# Altium PCB TP3PCB2.PcbDoc
Units mm, origin at the board's own origin, x right, y up, seen from the top; angles counter-clockwise.
Board outline 41 x 58.5 mm, 2 copper layers (Top Layer, Bottom Layer); 36 components, 22 nets, 142 pads, 20 vias.
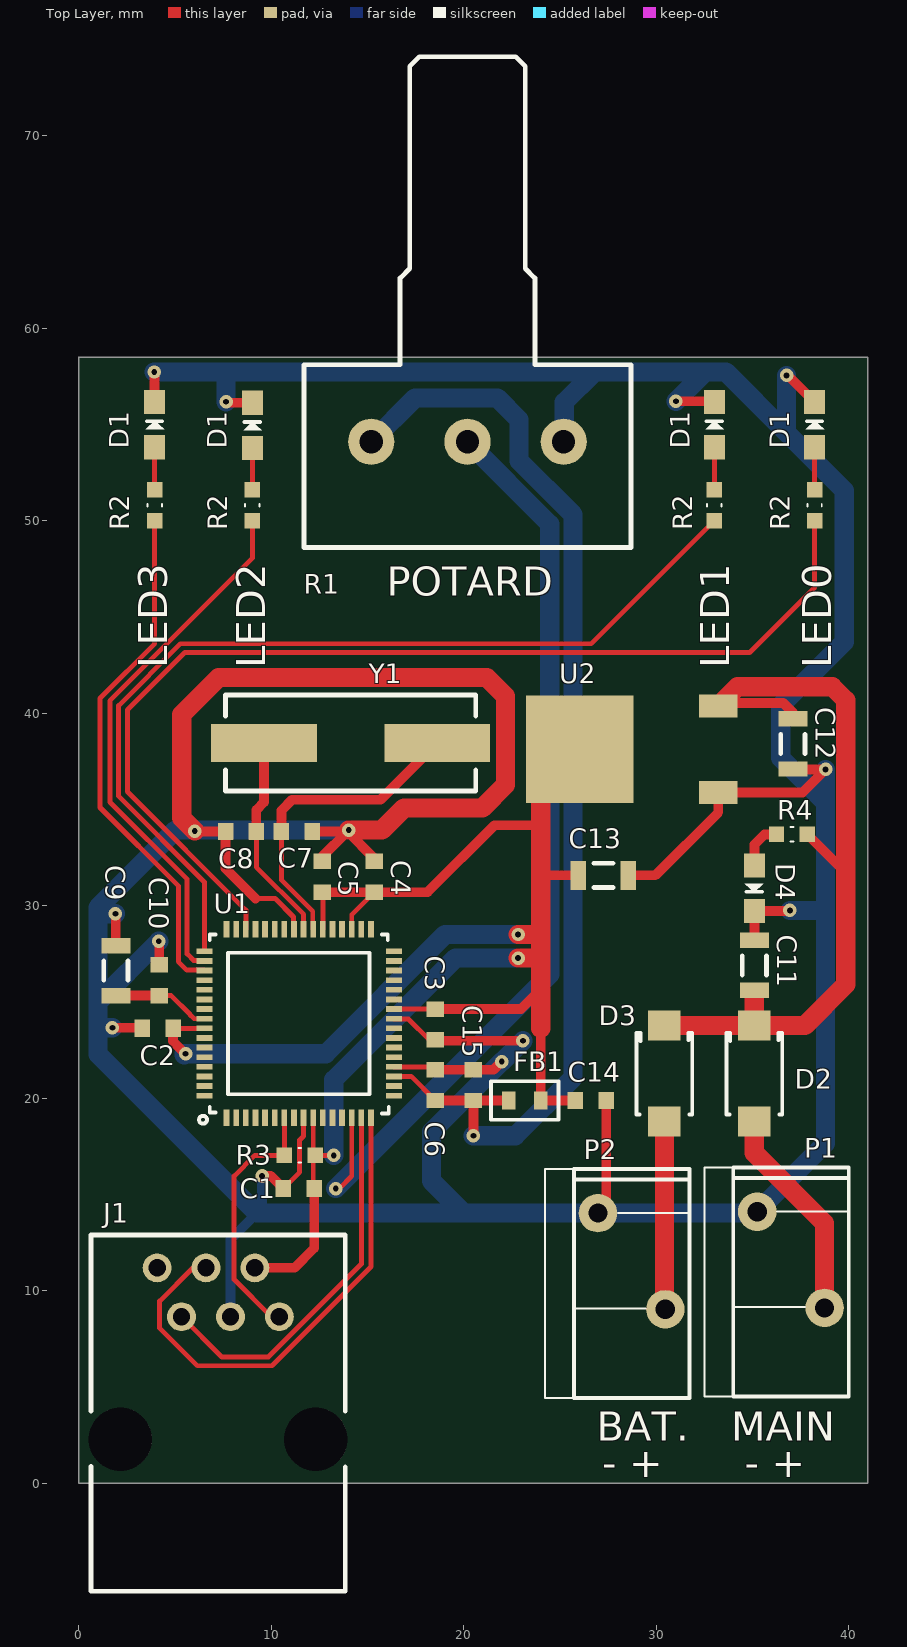
[diagram p0: Top Layer view]
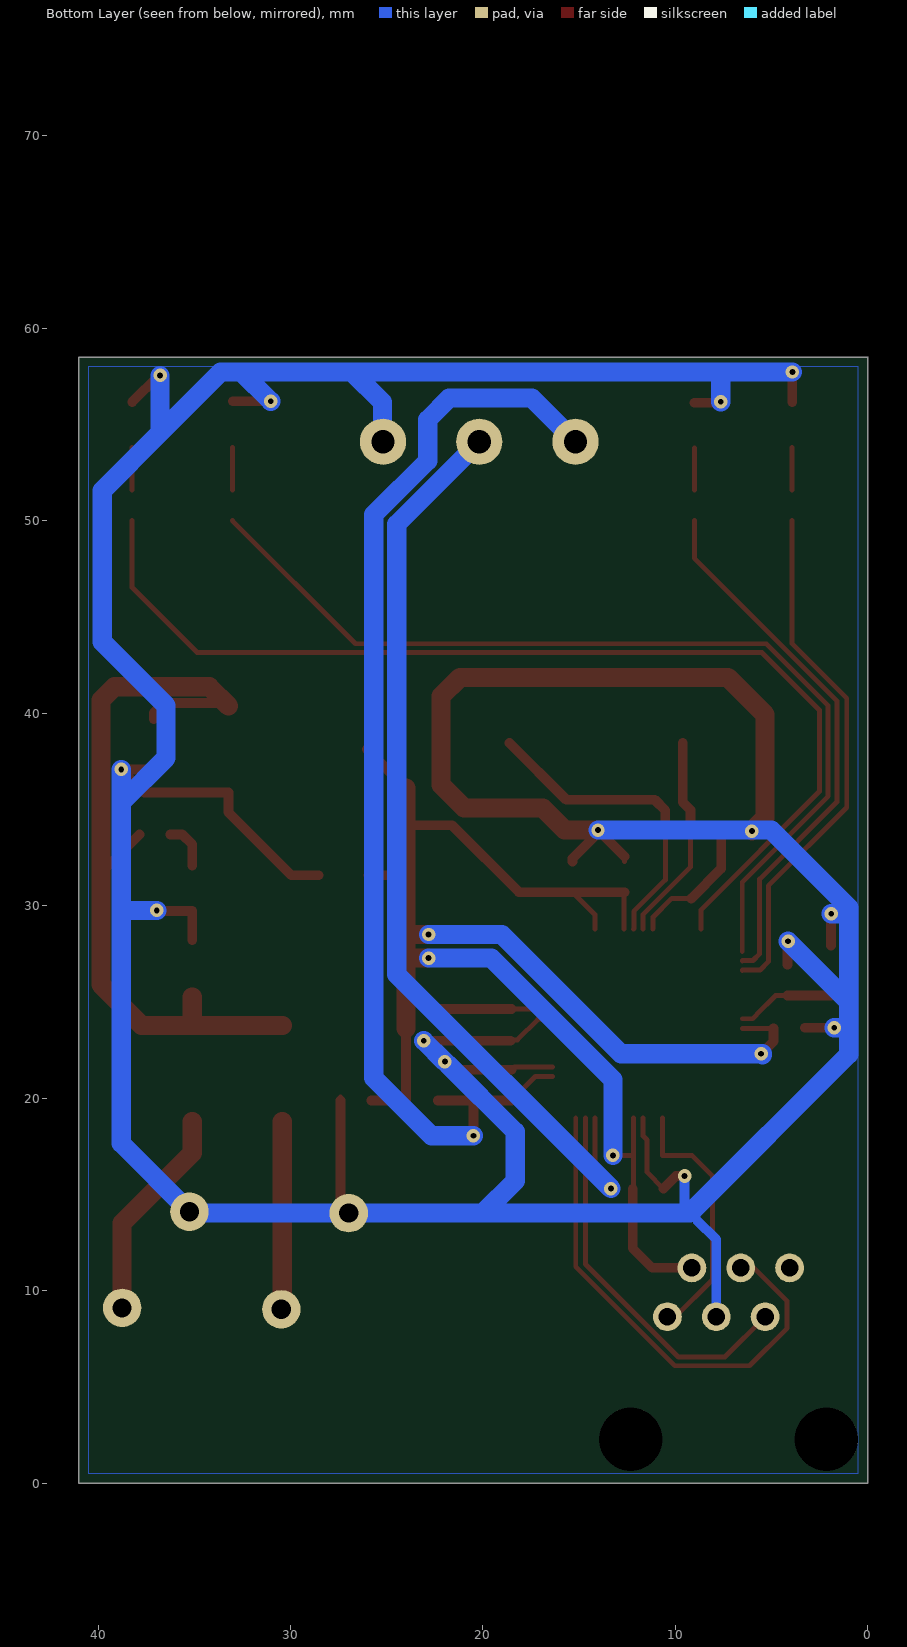
[diagram p1: Bottom Layer view, seen from below]

## Layer stack, top to bottom
Top Solder: solder mask 0.0102, Solder Resist, Dk 3.5
Top Layer: signal copper 0.0356
Dielectric 1: dielectric 0.32, FR-4, Dk 4.8
Bottom Layer: signal copper 0.0356
Bottom Solder: solder mask 0.0102, Solder Resist, Dk 3.5

## Board outline
0,0 0,58.5 41,58.5 41,0

## Design rules (kind name [scope] priority, off if disabled: settings)
Clearance [All] p1: gap=0.2 except(0.254: Arc-Arc)
HoleSize [All] p1: absolutevalues=TRUE maxlimit=3.3 minlimit=0.025 maxpercent=80.000 minpercent=20.000
PolygonConnect [All] p1: connectstyle=Relief reliefconductorwidth=0.254 reliefentries=4 polygonreliefangle="90 Angle" airgapwidth=0.254
RoutingVias [All] p1: holewidth=0.711 width=1.27 viastyle="Through Hole" minholewidth=0.3 minwidth=0.7 maxholewidth=0.711 maxwidth=1.27
SilkToBoardRegionClearance [All] p1 off:
SolderMaskExpansion [All] p1: expansion=0.102
UnpouredPolygon [All] p1: allowunpoured=FALSE
Width [All] p1: maxlimit=1 minlimit=0.254 preferedwidth=0.254 minimp=50.000000 maximp=50.000000 favimp=50.000000
Width GND [InNet('GND')] p2 off: maxlimit=1 minlimit=0.508 preferedwidth=1 minimp=50.000000 maximp=50.000000 favimp=50.000000
Width ALIM [InNet('ALIM')] p3 off: maxlimit=1 minlimit=0.254 preferedwidth=1
Width BATTERY [InNet('BATTERY')] p4 off: maxlimit=1 minlimit=0.254 preferedwidth=1
27 further rules are at their usual default settings.

## Classes and differential pairs
component class LED0: LED3_LED0 R2_3_LED1
component class LED3: R2
component class PIC: C1 C2 C3 C4 C6 C7 C8 C9 C10 J1 R3 U1 Y1
component class POWER: C11 C12 C13 C14 C15 D2 D3 D4 FB1 P1 P2 R4 U2
component class TP3: R1
net class LED[0..3]: LED0 LED1 LED2 LED3
channel class led: LED0 LED1 LED2 LED3

## Components (designator, comment, footprint, x,y, rotation, side; value= is the part's Value field where it differs from the comment)
C1 "100nF" CAPC1608N#1 11.425,15.3 r0 top
C2 "100nF" CAPC1608N#1 4.1,23.625 r0 top
C3 "100nF" CAPC1608N#1 18.525,23.825 r90 top
C4 "100nF" CAPC1608N#1 15.35,31.5 r270 top
C5 "100nF" CAPC1608N#1 12.65,31.5 r270 top
C6 "100nF" CAPC1608N#1 18.525,20.675 r270 top
C7 "20pF" CAPC1608N#1 11.325,33.85 r0 top
C8 "20pF" CAPC1608N#2 8.425,33.85 r0 top
C9 "10uF" CAPC2012N 1.925,26.625 r270 top
C10 "1uF" CAPC1608N#1 4.175,26.125 r270 top
C11 "10uF" CAPC2012N 35.1,26.9 r270 top
C12 "10uF" CAPC2012N 37.1,38.4 r90 top
C13 "10uF" CAPC2012N 27.25,31.575 r180 top
C14 "1uF" CAPC1608N#1 26.6,19.875 r180 top
C15 "100nF" CAPC1608N#1 20.5,20.675 r270 top
D1 "Green LED" "LED 0805" 38.227,54.991 r90 top
D1 "Green LED" "LED 0805" 33.02,54.991 r90 top
D1 "Green LED" "LED 0805" 9.017,54.953 r90 top
D1 "Green LED" "LED 0805" 3.937,54.991 r90 top
D2 "GF1A" SMA/DO-214AC 35.1,21.275 r90 top
D3 "GF1A" SMA/DO-214AC 30.425,21.275 r90 top
D4 "Green LED" "LED 0805" 35.1,30.9 r270 top
FB1 "600r" INDC1608AN 23.175,19.875 r0 top
J1 "Program / Debug" RJ12_90 7.239,6.731 r270 top
P1 "12V Main" PHOENIX_1985195 37,11.6 r0 top
P2 "12V Battery" PHOENIX_1985195 28.725,11.525 r0 top
R1 "1kΩ" PDB181-K 20.193,54.102 r0 top
R2 "330Ω" RESC1608N 38.227,50.8 r270 top
R2 "330Ω" RESC1608N 33.02,50.8 r270 top
R2 "330Ω" RESC1608N 9.017,50.8 r270 top
R2 "330Ω" RESC1608N 3.937,50.8 r270 top
R3 "4.7kΩ" RESC1608N 11.475,17.025 r0 top
R4 "470Ω" RESC1608N 37.05,33.7 r0 top
U1 "PIC32MX764F128H-I/PT" QFP50P1200X1200X120-64 11.43,23.876 r90 top
U2 "AP1117" TD03B_N 29.625,38.125 r90 top
Y1 "8MHz" HC49SDLF 14.125,38.45 r0 top

## Footprints (in the part's own frame and the unit in brackets; to place one, negate y for a bottom-side part, rotate by r counter-clockwise, add the part's x,y. Pads: shape width x height; smd on the part's side, far side on the other; paste and mask are expansions set on the pad)
CAPC1608N#1 [mm]
  rect 0.8x0.9 smd: 1(-0.8,0) 2(0.8,0)
CAPC1608N#2 [mm]
  rect 0.8x0.9 smd: 1(0.8,0) 2(-0.8,0)
CAPC2012N [mm]
  rect 0.8x1.5 smd: 1(-1.3,0) 2(1.3,0)
  silkscreen extent -0.5,-0.63 0.5,0.63
HC49SDLF [mm]
  rect 5.5x2 smd: 1(-4.5,0) 2(4.5,0)
  silkscreen extent -6.5,-2.5 6.5,2.5
INDC1608AN [mm]
  rect 0.7x0.95 smd: 1(0.825,0) 2(-0.825,0)
  silkscreen extent -1.75,-1 1.75,1
"LED 0805" [mm]
  rect 1.25x1.1 smd: 1(-1.175,0) 2(1.175,0)
  silkscreen extent -0.25,-0.5 0.2,0.45
PDB181-K [mm]
  round 2.4 hole 1.2: 1(-5,0) 2(0,0) 3(5,0)
  silkscreen extent -8.5,-5.5 8.5,20
PHOENIX_1985195 [mm]
  round 2 hole 1: 1(-1.75,2.5) 2(1.75,-2.5)
  silkscreen extent -4.5,-7.1 3,4.8
QFP50P1200X1200X120-64 [mm]
  rect 0.85x0.3 smd: 1(-4.9,3.75) 2(-4.9,3.25) 3(-4.9,2.75) 4(-4.9,2.25) 5(-4.9,1.75) 6(-4.9,1.25) 7(-4.9,0.75) 8(-4.9,0.25) 9(-4.9,-0.25) 10(-4.9,-0.75) 11(-4.9,-1.25) 12(-4.9,-1.75) 13(-4.9,-2.25) 14(-4.9,-2.75) 15(-4.9,-3.25) 16(-4.9,-3.75) 33(4.9,-3.75) 34(4.9,-3.25) 35(4.9,-2.75) 36(4.9,-2.25) 37(4.9,-1.75) 38(4.9,-1.25) 39(4.9,-0.75) 40(4.9,-0.25) 41(4.9,0.25) 42(4.9,0.75) 43(4.9,1.25) 44(4.9,1.75) 45(4.9,2.25) 46(4.9,2.75) 47(4.9,3.25) 48(4.9,3.75)
  rect 0.3x0.85 smd: 17(-3.75,-4.95) 18(-3.25,-4.95) 19(-2.75,-4.95) 20(-2.25,-4.95) 21(-1.75,-4.95) 22(-1.25,-4.95) 23(-0.75,-4.95) 24(-0.25,-4.95) 25(0.25,-4.95) 26(0.75,-4.95) 27(1.25,-4.95) 28(1.75,-4.95) 29(2.25,-4.95) 30(2.75,-4.95) 31(3.25,-4.95) 32(3.75,-4.95) 49(3.75,4.9) 50(3.25,4.9) 51(2.75,4.9) 52(2.25,4.9) 53(1.75,4.9) 54(1.25,4.9) 55(0.75,4.9) 56(0.25,4.9) 57(-0.25,4.9) 58(-0.75,4.9) 59(-1.25,4.9) 60(-1.75,4.9) 61(-2.25,4.9) 62(-2.75,4.9) 63(-3.25,4.9) 64(-3.75,4.9)
  silkscreen extent -5.21,-4.67 4.62,5.18
RESC1608N [mm]
  rect 0.8x0.8 smd: 1(-0.8,0) 2(0.8,0)
  silkscreen extent -0.08,-0.38 0.08,0.38
RJ12_90 [mm]
  round 3.25 hole 3.3 unplated: 0(4.45,5.08) 0(4.45,-5.08)
  round 1.5 hole 0.9: 1(-1.91,3.18) 2(-4.45,1.91) 3(-1.91,0.64) 4(-4.45,-0.63) 5(-1.91,-1.9) 6(-4.45,-3.17)
  silkscreen extent -6.15,-6.6 12.35,6.6
SMA/DO-214AC [mm]
  rect 1.56x1.68 smd: 1(-2.5,0) 2(2.5,0)
  silkscreen extent -2.12,-1.45 2.1,1.45
TD03B_N [mm]
  rect 1.2x2 smd: 1(-2.25,-3.6) 3(2.25,-3.6)
  rect 5.6x5.6 smd: 4(0,3.6)

## Part data
C1 C2 C3 C4 C5 C6 C7 C8 C9 C10 C11 C12 C13 C14 C15: library part Cap, "Capacitor"
D1 D1 D1 D1 D4: library part LED0, "Typical INFRARED GaAs LED"
D2 D3: library part Diode, "Default Diode"
FB1: library part Inductor, "Inductor"
J1: library part CON6
P1 P2: library part "Header 2", "Header, 2-Pin"
R1: library part RPot, "Potentiometer"
R2 R2 R2 R2 R3 R4: library part Res1, "Resistor"
U1: "PIC32MX764F128H"
U2: "1A LDO, 18V input, DPAK"
Y1: library part XTAL, "Crystal Oscillator"

## Via types
v1: diameter 0.7, hole 0.3, Top Layer to Bottom Layer, 19 vias
v2: diameter 0.71, hole 0.3, Top Layer to Bottom Layer, 1 vias

## Nets (pads, with @x,y where several pads share a name; then routed paths per layer and width w, separated by ;. In a path a pad name is that pad's centre, name@x,y a point inside that pad or via, vN(x,y) a via of type N, cw(c..) or ccw(c..) an arc to the next point about the centre after c; other vN are vias at no path point)
ALIM: D2.1 P1.2 | length 11.2
  Top Layer w1: D2.1 35.1,17.15 38.75,13.5 P1.2
BATTERY: D3.1 P2.2 | length 9.8
  Top Layer w1: D3.1 30.425,9.075 P2.2
GND: C1.1 C2.1 C3.1 C4.1 C5.1 C6.1 C7.2 C8.2 C9.1 C10.1 C11.1 C12.1 C13.1 C14.1 C15.1 D1.2 D4.2 J1.3 P1.1 P2.1 R1.3 U1.9 U1.20 U1.25 U1.41 U2.1 | length 286.2
  Top Layer w0.254: v1(1.9,29.575) v1@1.925,29.55 ; v1(7.65,56.175) v1@7.697,56.128 ; 9.175,30.375 10.194,30.375 11.157,29.412 11.157,28.799 U1.41 ; C1.1 11.475,16.15 11.475,17.825 11.68,18.03 U1.9 ; C5.1 C5.1@12.65,32.55 ; U1.20 18.374,21.626 C6.1 ; U1.25 16.403,24.103 17.132,24.103 18.21,23.025 C3.1 C3.1@18.575,22.975 ; C14.1 C14.1@27.4,20.05 ; D1.2@32.986,56.2 D1.2@33.02,56.166 ; v1(36.775,57.55) v1@36.843,57.55
  Top Layer w0.5: P2.1 P2.1@27.4,14.45
  Top Layer w0.508: v1(1.75,23.65) C2.1@3.275,23.65 ; C9.1 v1@1.925,29.55 ; D1.2@3.937,56.166 v1@3.937,57.713 ; C10.1 v1@4.175,28.125 ; v1(6.025,33.875) 6.05,33.85 C8.2 7.625,31.925 9.175,30.375 ; v1@7.697,56.128 D1.2@9.017,56.128 ; v2(9.525,15.95) 9.975,15.95 C1.1 ; C7.2 v1@13.95,33.85 ; C5.1@12.65,32.55 v1@13.95,33.85 ; C4.1 15.35,32.45 v1@13.95,33.85 ; C6.1 C15.1 21.55,21.475 v1(21.975,21.9) ; C3.1@18.575,22.975 v1(23.075,22.975) ; P2.1@27.4,14.45 C14.1 ; C13.1 29.95,31.575 33.225,34.85 U2.1 37.6,35.875 v1(38.8,37.075) C12.1@37.125,37.075 ; v1(31.025,56.2) D1.2@32.986,56.2 ; C11.1 D4.2 v1@36.925,29.725 ; v1@36.843,57.55 D1.2@38.227,56.166
  Top Layer w1: v1(6.025,33.875) 5.35,34.55 5.35,39.925 7.275,41.85 21.2,41.85 22.175,40.875 22.175,36.275 20.975,35.075 16.9,35.075 15.75,33.925 v1(14.025,33.925)
  Bottom Layer w0.254: 1,23.625 1.025,23.65 ; 7.65,57.7 7.675,57.725 ; 9.25,14.025 9.525,14.3 ; 32.55,57.725 32.6,57.725
  Bottom Layer w0.5: J1.3 7.879,12.654 8.9,13.675
  Bottom Layer w0.508: 9.525,14.3 v2(9.525,15.95)
  Bottom Layer w1: 1,25 v1(4.15,28.15) ; 1.025,23.65 v1(1.75,23.65) ; v1(1.9,29.575) 1,29.575 ; v1(3.925,57.725) 7.675,57.725 32.55,57.725 v1(31.025,56.2) ; v1(7.65,56.175) 7.65,57.7 ; v1(14.025,33.925) 5.025,33.925 1,29.9 1,29.575 ; v1@21.85,21.775 18.325,18.25 18.325,15.7 20,14.025 ; v1(21.975,21.9) 22,21.9 v1(23.075,22.975) ; R1.3 25.225,54.134 25.225,56.15 26.8,57.725 ; 32.6,57.725 33.625,57.725 36.775,54.575 ; P1.1@35.175,14.025 P2.1 20,14.025 ; P1.1 38.8,17.65 38.8,35.35 ; v1(36.775,57.55) 36.775,54.575 ; v1(36.95,29.75) 38.775,29.75 ; v1(38.8,37.075) 38.8,35.35 ; 1,29.575 1,23.625 1,22.275 9.25,14.025 20,14.025 ; 36.775,54.575 39.775,51.575 39.775,43.7 36.475,40.4 36.475,37.675 38.8,35.35
LED0: R2.2@38.227,50 U1.46 | length 55.8
  Top Layer w0.254: U1.46 8.68,29.77 2.521,35.929 2.521,40.163 5.508,43.15 34.85,43.15 38.227,46.527 R2.2@38.227,50
LED1: R2.2@33.02,50 U1.49 | length 49.5
  Top Layer w0.254: U1.49 6.53,31.22 2.067,35.683 2.067,40.392 5.279,43.604 26.624,43.604 R2.2@33.02,50
LED2: R2.2@9.017,50 U1.50 | length 28.3
  Top Layer w0.254: U1.50 6.53,27.149 5.97,27.149 5.625,27.494 5.625,31.375 1.613,35.387 1.613,40.646 9.017,48.05 R2.2@9.017,50
LED3: R2.2@3.937,50 U1.51 | length 27.3
  Top Layer w0.254: R2.2@3.937,50 3.937,43.612 1.1,40.775 1.1,35.1 5.171,31.029 5.171,27.088 5.61,26.649 6.507,26.649 U1.51
MCLR: J1.1 R3.1 U1.7 | length 13.5
  Top Layer w0.254: J1.1 10.009,8.641 8.072,10.578 8.072,15.947 9.15,17.025 R3.1 ; R3.1@10.68,17.03 U1.7
NetC9_2: C9.2 C10.2 U1.56 | length 5.1
  Top Layer w0.254: C10.2 4.8,25.325 5.778,24.347 5.778,24.341 5.993,24.126 U1.56
  Top Layer w0.508: C9.2 C10.2
NetD1_LED0_1: D1.1@38.227,53.816 R2.1@38.227,51.6 | length 2.2
  Top Layer w0.254: R2.1@38.227,51.6 D1.1@38.227,53.816
NetD1_LED1_1: D1.1@33.02,53.816 R2.1@33.02,51.6 | length 2.2
  Top Layer w0.254: R2.1@33.02,51.6 D1.1@33.02,53.816
NetD1_LED2_1: D1.1@9.017,53.778 R2.1@9.017,51.6 | length 2.2
  Top Layer w0.254: R2.1@9.017,51.6 D1.1@9.017,53.778
NetD1_LED3_1: D1.1@3.937,53.816 R2.1@3.937,51.6 | length 2.2
  Top Layer w0.254: R2.1@3.937,51.6 D1.1@3.937,53.816
NetD4_1: D4.1 R4.1 | length 2.5
  Top Layer w0.508: D4.1 35.1,33.175 35.625,33.7 R4.1
NetR1_2: R1.2 U1.14 | length 49.3
  Top Layer w0.254: v1(13.35,15.3) 13.525,15.3 14.18,15.955 U1.14
  Bottom Layer w1: v1(13.35,15.3) 24.475,26.425 24.475,49.82 R1.2
PGC: J1.5 U1.15 | length 19.8
  Top Layer w0.254: J1.5 7.43,6.55 9.851,6.55 14.68,11.379 U1.15
PGD: J1.4 U1.16 | length 26.2
  Top Layer w0.254: J1.4 5.931,11.181 4.2,9.45 4.2,8.05 6.154,6.096 10.039,6.096 15.18,11.237 U1.16
V3P3: C1.2 C2.2 C3.2 C4.2 C5.2 C13.2 C14.2 FB1.1 J1.2 R3.2 U1.10 U1.26 U1.35 U1.38 U1.57 U2.4 | length 101
  Top Layer w0.254: C2.2@4.901,23.626 U1.57 ; U1.10 12.18,15.345 C1.2 ; R3.2 v1(13.25,17.025) ; U1.38 C5.2@12.68,30.67 ; U1.35 14.18,29.53 C4.2 ; U1.26 C3.2
  Top Layer w0.5: J1.2 11.206,11.181 12.225,12.2 C1.2 ; 23.9,28.5 24,28.4 ; 23.95,29.975 24,29.925 ; 23.95,31.4 24,31.45 ; 23.95,33 24,33.05 ; 23.975,27.275 24,27.3
  Top Layer w0.508: C2.2 4.9,22.951 v1(5.55,22.301) ; C5.2 C4.2 18.125,30.7 21.6,34.175 23.925,34.175 ; C3.2 C3.2 ; C3.2@18.526,24.626 C3.2 ; 24,23.625 FB1.1 C14.2 ; 24,25.65 22.975,24.625 C3.2 ; U2.4@24,36.1 U2.4 ; 24.175,31.575 C13.2
  Top Layer w1: v1(22.825,27.275) 23.975,27.275 ; v1(22.825,28.5) 23.9,28.5 ; 24,23.625 24,25.65 24,27.3 24,28.4 24,29.925 24,31.45 24,33.05 U2.4@24,36.1
  Bottom Layer w1: v1@5.475,22.25 v1@5.525,22.3 ; v1@5.475,22.3 v1@5.525,22.3 ; v1(5.55,22.301) 5.526,22.301 v1@5.525,22.3 ; v1(13.25,17.025) 13.25,20.95 19.575,27.275 v1(22.825,27.275) ; v1(22.825,28.5) 19.025,28.5 12.825,22.3 v1@5.525,22.3
V3P3A: C6.2 C15.2 FB1.2 R1.1 U1.19 | length 59.2
  Top Layer w0.254: U1.19 17.274,21.126 C6.2
  Top Layer w0.508: C6.2 C15.2 ; v1(20.5,18.05) C15.2 ; FB1.2 C15.2
  Bottom Layer w1: R1.1 17.466,56.375 21.75,56.375 22.875,55.25 22.875,53.117 25.675,50.317 25.675,21.05 22.675,18.05 v1(20.5,18.05)
V5: C11.2 C12.2 D2.2 D3.2 R4.2 U2.3 | length 41.1
  Top Layer w0.508: U2.3 33.375,40.525 36.6,40.525 37.1,40.025 C12.2 ; R4.2 39.725,31.825 39.85,31.825
  Top Layer w1: D3.2 D2.2 ; U2.3 34.225,41.375 39.15,41.375 39.85,40.675 39.85,31.825 39.85,25.9 37.725,23.775 D2.2 ; C11.2@35.1,25.25 D2.2
X1: C7.1 U1.39 Y1.2 | length 16.4
  Top Layer w0.254: C7.1 10.525,31.342 12.157,29.71 12.157,28.799 U1.39
  Top Layer w0.508: C7.1 10.525,34.95 11.075,35.5 15.675,35.5 Y1.2
X2: C8.1 U1.40 Y1.1 | length 10.9
  Top Layer w0.254: C8.1 9.225,32 11.68,29.545 U1.40
  Top Layer w0.508: C8.1 9.225,34.975 9.625,35.375 Y1.1
pads on no net: J1.0 J1.6 U1.1 U1.2 U1.3 U1.4 U1.5 U1.6 U1.8 U1.11 U1.12 U1.13 U1.17 U1.18 U1.21 U1.22 U1.23 U1.24 U1.27 U1.28 U1.29 U1.30 U1.31 U1.32 U1.33 U1.34 U1.36 U1.37 U1.42 U1.43 U1.44 U1.45 U1.47 U1.48 U1.52 U1.53 U1.54 U1.55 U1.58 U1.59 U1.60 U1.61 U1.62 U1.63 U1.64

## Polygon pours and split planes (outlines as drawn)
GND on Bottom Layer "Top Layer-No Net" (solid, shelved, pour order 5): 0.5,58 40.5,58 40.5,0.5 0.5,0.5 0.5,0.55 0.5,1.575

## Keep-outs
Drill Drawing:
  lines w0.1: 0,58.5 0,58.5
Mechanical 32:
  the board outline again, w0.15

## Silkscreen, mask and mechanical layers (free items; w line width, h text height)
Top Overlay:
  text "POTARD" at 16,46.1 h1.52
  text "LED3" at 4.6,42.325 h1.52 r90
  text "LED2" at 9.7,42.325 h1.52 r90
  text "LED1" at 33.8,42.325 h1.52 r90
  text "LED0" at 39.1,42.325 h1.52 r90
  text "BAT." at 26.9,2.2 h1.52
  text "MAIN" at 33.9,2.2 h1.52
  text "- +" at 27.2,0.3 h1.52
  text "- +" at 34.6,0.3 h1.52
Drill Drawing:
  circle w0.025: c49.165,13.108 r0.635
  lines w0.025: 48.53,4.853 49.165,5.171 49.8,4.853 49.483,5.488 49.8,6.123 49.165,5.806 48.53,6.123 48.848,5.488 48.53,4.853 ; 48.53,8.663 49.8,8.663 49.8,9.933 48.53,9.933 48.53,8.663 ; 48.53,17.553 49.8,17.553 49.165,16.283 48.53,17.553 ; 48.53,20.411 48.848,20.411 48.848,20.093 49.483,20.093 49.483,20.411 49.8,20.411 49.8,21.046 49.483,21.046 49.483,21.363 48.848,21.363 48.848,21.046 48.53,21.046 48.53,20.411
  lines w0.381: 46.8,3.71 145.326,3.71 ; 46.8,22.76 145.326,22.76 ; 60.792,-0.1 60.792,26.57 ; 78.517,-0.1 78.517,26.57 ; 112.695,-0.1 112.695,26.57 ; 125.544,-0.1 125.544,26.57 ; 46.8,-0.1 145.326,-0.1 145.326,26.57 46.8,26.57 46.8,-0.1
  text "Symbol" at 49.086,23.903 h1.83
  text "Hit Count" at 61.935,23.903 h1.83
  text "Finished Hole Size" at 79.66,23.903 h1.83
  text "Plated" at 113.838,23.903 h1.83
  text "Hole Type" at 126.687,23.903 h1.83
  text "2" at 61.935,20.093 h1.52
  text "3.300mm (129.92mil)" at 79.66,20.093 h1.52
  text "NPTH" at 113.838,20.093 h1.52
  text "Round" at 126.687,20.093 h1.52
  text "3" at 61.935,16.283 h1.52
  text "1.200mm (47.24mil)" at 79.66,16.283 h1.52
  text "PTH" at 113.838,16.283 h1.52
  text "Round" at 126.687,16.283 h1.52
  text "4" at 61.935,12.473 h1.52
  text "1.000mm (39.37mil)" at 79.66,12.473 h1.52
  text "PTH" at 113.838,12.473 h1.52
  text "Round" at 126.687,12.473 h1.52
  text "6" at 61.935,8.663 h1.52
  text "0.900mm (35.43mil)" at 79.66,8.663 h1.52
  text "PTH" at 113.838,8.663 h1.52
  text "Round" at 126.687,8.663 h1.52
  text "20" at 61.935,4.853 h1.52
  text "0.300mm (11.81mil)" at 79.66,4.853 h1.52
  text "PTH" at 113.838,4.853 h1.52
  text "Round" at 126.687,4.853 h1.52
  text "35 Total" at 61.935,1.043 h1.52

## Dimensions
0,58.5 to 0,0 on Mechanical 1
0,0 to 41,0 on Mechanical 1